# EAGLE board RADiuS-DSMA (EAGLE 6.2)
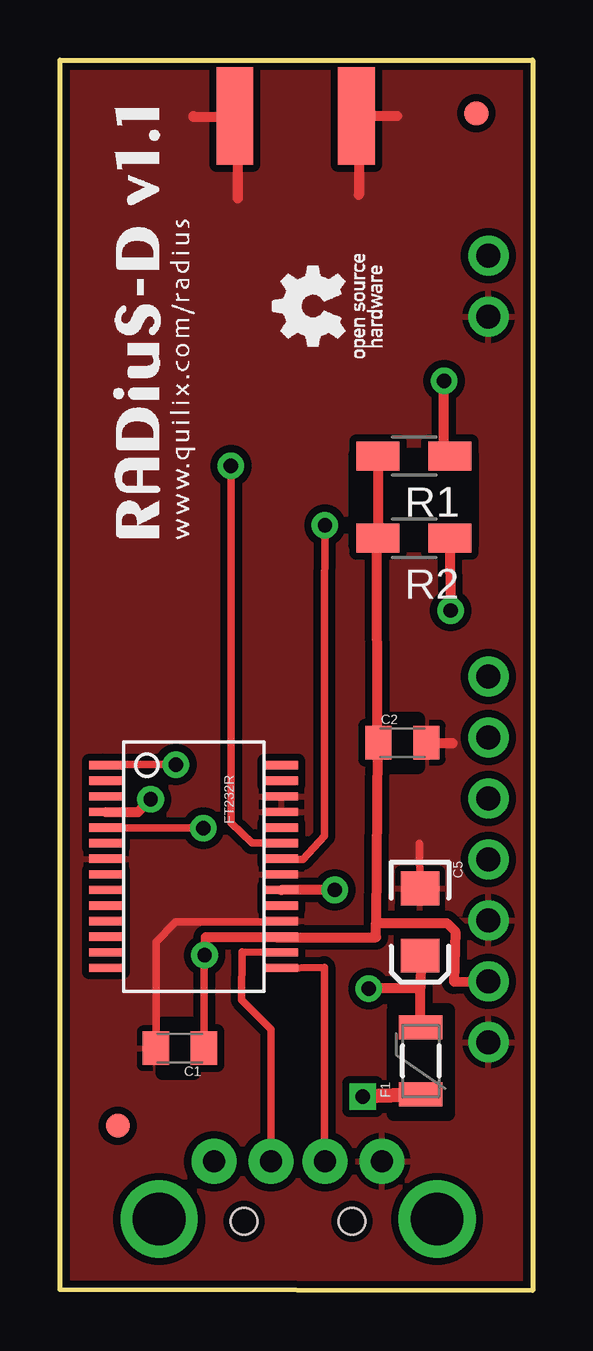
[diagram p0: board, top side]
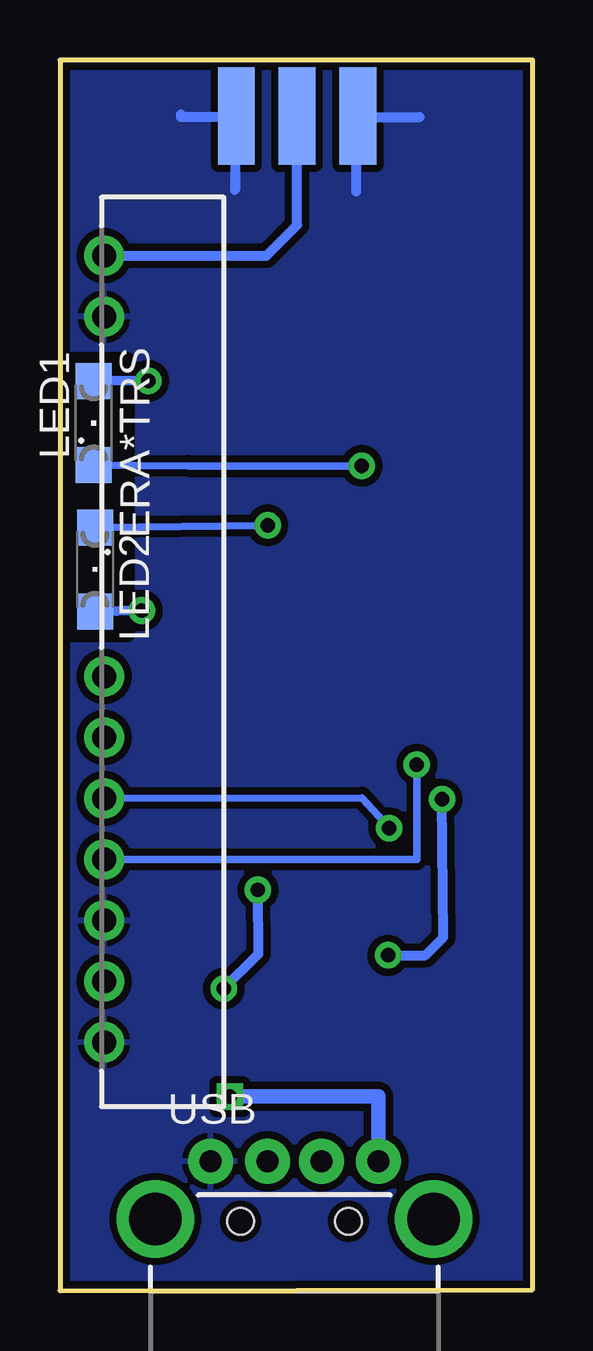
[diagram p1: board, bottom side, seen from below]

Size 19.71 x 51.3 mm. Coordinates in mm from the lower left corner, seen from the top.
Outline: 19.71,51.3 19.71,0 0,0.05 0,51.3 19.71,51.3
Copper layers (1*16): Top 0.035mm / dielectric 1.5mm / Bottom 0.035mm
Design rules: minimum track width 8mil, minimum drill 20mil, track to track 8mil, track to pad 8mil, pad to pad 8mil, via to via 8mil, smd to smd 8mil, copper to edge 10mil, drill to drill 8mil, minimum pad ring 12mil, minimum via ring 10mil, stop-mask expansion 4mil, vias tented up to drill 20mil, thermal gap 10mil
Net classes: 0 default: width 0.203 mm; 1 power: width 0.254 mm
tRestrict: area 13.9,7.4 to 16.2,11.7; area 4.3,9.1 to 5.6,11.1; area 13.6,21.8 to 14.9,23.8; area 12.3,31.1 to 17.2,34.8
bRestrict: area 16.9,27.3 to 19.4,38.8

## Footprints (pad centres in the part's own frame; a part is rotated, then mirrored left to right if it is on the bottom)
C0805K = smd 1.1 x 1.4: 1 -1,0; 2 1,0
EIA3216 = smd 1.4 x 1.6: A 1.4,0; C -1.4,0
FIDUCIAL = smd 1 x 1: 1 0,0
SIL9 = drill 1 pad 1.676: 1 -16.51,2.54; 2 -13.97,2.54; 3 1.03,2.54; 4 3.57,2.54; 5 6.11,2.54; 6 8.65,2.54; 7 11.19,2.54; 8 13.73,2.54; 9 16.27,2.54
PTC-1206 = smd 1 x 1.8: 1 -1.4,0; 2 1.4,0
SSOP28DB = smd 0.348 x 1.397: 1 -4.225,-3.656; 2 -3.575,-3.656; 3 -2.925,-3.656; 4 -2.275,-3.656; 5 -1.625,-3.656; 6 -0.975,-3.656; 7 -0.325,-3.656; 8 0.325,-3.656; 9 0.975,-3.656; 10 1.625,-3.656; 11 2.275,-3.656; 12 2.925,-3.656; 13 3.575,-3.656; 14 4.225,-3.656; 15 4.225,3.656; 16 3.575,3.656; 17 2.925,3.656; 18 2.275,3.656; 19 1.625,3.656; 20 0.975,3.656; 21 0.325,3.656; 22 -0.325,3.656; 23 -0.975,3.656; 24 -1.625,3.656; 25 -2.275,3.656; 26 -2.925,3.656; 27 -3.575,3.656; 28 -4.225,3.656
SMA-EDGE = smd 1.524 x 4.064: GND@0 0,0; GND@1 5.08,0; SIG 2.54,0 | smd 1.524 x 4.064 bottom: GND@2 0,0; GND@3 5.08,0
SML1206 = smd 1.5 x 1.5: A 1.75,0; C -1.75,0
R1206W = smd 1.8 x 1.2: 1 -1.499,0; 2 1.499,0
USB-A-H = drill 0.914 pad 1.88: D+ 2.4,1.127; D- 2.4,-1.127; GND 2.4,3.5; VBUS 2.4,-3.5 | drill 2.2: GND2 0,-5.8; GND3 0,5.8 | hole 1.1: -0.1,2.25; -0.1,-2.25

## Placement (x,y rotation side)
C1  0.1uF  [C0805K]  5,10.11 180 top
C2  0.1uF  [C0805K]  14.28,22.85 0 top
C5  10uF  [EIA3216]  15.02,15.37 270 top
E$1  [FIDUCIAL]  2.41,6.87 0 top
E$2  [FIDUCIAL]  17.36,49.07 0 top
ERA*TRS  [SIL9]  20.41,26.63 270 bottom
F1  500mA  [PTC-1206]  15.04,9.58 90 top
FT232R  FT232R  [SSOP28DB]  5.58,17.68 270 top
GND  [SMA-EDGE]  12.36,48.97 0 bottom
LED1  Red  [SML1206]  18.31,36.17 90 bottom
LED2  Green  [SML1206]  18.25,30.07 270 bottom
R1  330  [R1206W]  14.76,34.79 180 top
R2  330  [R1206W]  14.76,31.37 180 top
USB  USBSMD  [USB-A-H]  9.93,2.99 90 bottom

## Library data of the parts
C1 C2 = adafruit
C5 E$1 E$2 F1 FT232R GND USB = SparkFun
ERA*TRS = lprs
LED1 LED2 = led
R1 R2 = ref-packages

## Nets
3.3V [power]: C1.1 C2.1 ERA*TRS.8 FT232R.4 FT232R.17 R1.2 R2.2
ANT: ERA*TRS.1 GND.SIG
GND [power]: C1.2 C2.2 C5.C ERA*TRS.2 ERA*TRS.7 ERA*TRS.9 FT232R.7 FT232R.18 FT232R.21 FT232R.25 FT232R.26 USB.GND
N$1: LED1.A R1.1
N$2: LED2.A R2.1
N$3: F1.1 USB.VBUS
RXD: ERA*TRS.5 FT232R.5
RXLED: FT232R.22 LED2.C
S$2 [power]: C5.A F1.2 FT232R.20
TXD: ERA*TRS.6 FT232R.1
TXLED: FT232R.23 LED1.C
USB_D+: FT232R.15 USB.D+
USB_D-: FT232R.16 USB.D-

## Tracks (layer width: path | path; a pad name or v marks a point on that pad's centre or on a via)
3.3V  (via drill 0.6)
  Top 0.305: 8.96,14.73 FT232R.17 9.01,14.73 | 6,14 C1.1 | 13.21,31.45 R2.2 | C2.1 13.23,22.73
  Top 0.406: 8.96,14.73 6.08,14.73 v6.03,13.98 6,14 | 9.01,14.73 13.18,14.73 13.18,15.33 | 13.18,15.33 16.13,15.33 16.48,14.98 16.43,12.88 17.66,12.9 ERA*TRS.8 | FT232R.4 3.26,19.96 v3.78,20.48 | R1.2 R2.2 | 13.21,31.45 13.23,22.73 13.18,15.33
  Bottom 0.406: v6.03,13.98 4.48,13.98 3.73,14.73 v3.78,20.48
ANT
  Bottom 0.406: ERA*TRS.1 11.1,43.14 9.81,44.42 9.81,48.07 9.91,48.17 9.91,48.88 GND.SIG
GND
  Top 0.305: FT232R.18 8.96,15.38 4.83,15.38 4,14.55 C1.2 | 14.99,18.64 C5.C
  Top 0.406: 15.43,22.83 16.38,22.83 | 7.41,47.97 7.41,45.52 | 12.46,47.52 12.46,45.67 | 7.21,48.92 5.56,48.92 5.56,48.97 | 12.31,48.97 14.06,48.97
  Bottom 0.406: 7.36,48.22 7.36,45.82 | 12.46,47.82 12.41,47.82 12.41,45.87 | 7.41,48.92 4.71,48.92 | 12.46,48.92 14.66,48.92 14.66,49.02
  pour Bottom (isolate 0.305): 0.2,51.1 19.46,51.1 19.46,0.39 0.2,0.39
  pour Top (isolate 0.305): 0.15,51.15 19.51,51.25 19.51,0.16 0.2,0.16
N$1  (via drill 0.6)
  Top 0.406: R1.1 16.02,34.88 v16.02,37.93
  Bottom 0.406: v16.02,37.93 LED1.A
N$2  (via drill 0.6)
  Top 0.406: R2.1 v16.29,28.35
  Bottom 0.406: v16.29,28.35 LED2.A
N$3  (via drill 0.6)
  Top 0.61: F1.1 v12.63,8.09
  Bottom 0.61: v12.63,8.09 6.43,8.11 USB.VBUS
RXD  (via drill 0.6)
  Top 0.305: FT232R.5 1.7,19.28 v5.98,19.28
  Bottom 0.305: v5.98,19.28 7.13,20.54 ERA*TRS.5
RXLED  (via drill 0.6)
  Top 0.305: FT232R.22 9.01,17.98 10.13,17.98 11.03,18.95 11.03,28.23 v11.05,31.9
  Bottom 0.305: v11.05,31.9 LED2.C
S$2  (via drill 0.6)
  Top 0.305: C5.A 15.05,13.8
  Top 0.406: 15.05,13.8 15.03,12.6 15.03,12.59 | F1.2 15.03,10.93 15.03,12.59 | v11.46,16.71 FT232R.20 | 15.03,12.59 v12.88,12.59
  Bottom 0.406: v11.46,16.71 11.43,14.03 v12.88,12.59
TXD  (via drill 0.6)
  Top 0.305: FT232R.1 1.75,21.93 v4.83,21.93
  Bottom 0.305: v4.83,21.93 4.83,17.98 ERA*TRS.6
TXLED  (via drill 0.6)
  Top 0.305: v7.13,34.38 7.13,19.5 8.01,18.66 FT232R.23
  Bottom 0.305: LED1.C 14.35,34.38 v7.13,34.38
USB_D+
  Top 0.305: FT232R.15 9.01,13.43 11.03,13.48 11.03,5.58 11.05,5.45 USB.D+
USB_D-
  Top 0.305: FT232R.16 7.59,14.13 7.58,12.13 8.81,10.9 USB.D-